# EAGLE board id mini (EAGLE 4.09)
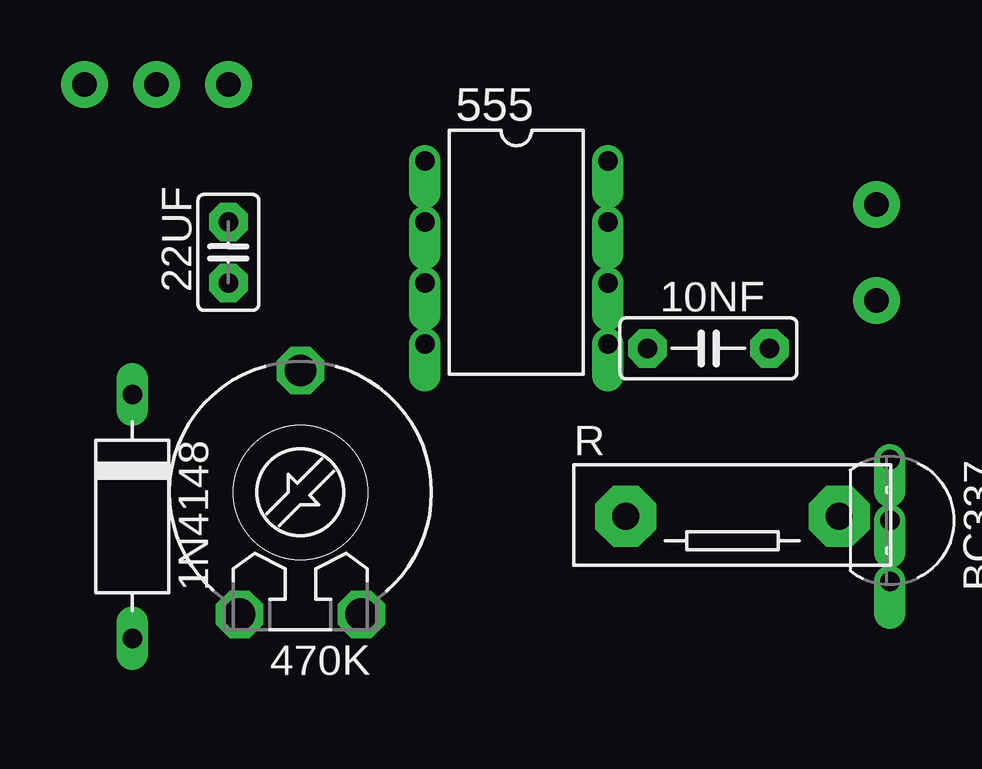
[diagram p0: board, top side]
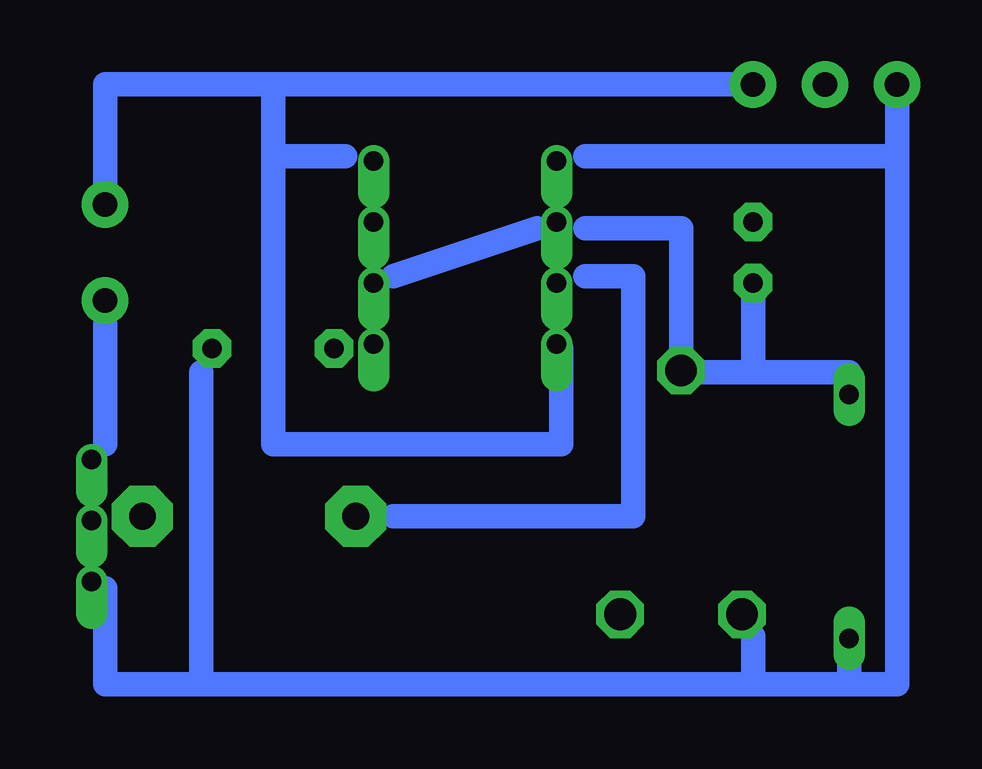
[diagram p1: board, bottom side, seen from below]

No outline drawn. Coordinates in mm, seen from the top.
Copper layers used: Bottom

## Footprints (pad centres in the part's own frame; a part is rotated, then mirrored left to right if it is on the bottom)
D-10 = drill 0.813 long: A 5.08,0; C -5.08,0
C5B2.5 = drill 0.813 pad 1.6 octagon: 1 -2.54,0; 2 2.54,0
C2.5-2 = drill 0.813 pad 1.6 octagon: 1 -1.27,0; 2 1.27,0
LI10 = drill 1.321 octagon: A -2.54,-5.08; E 2.54,-5.08; S 0,5.08
DIL08 = drill 0.813 offset: 1 -3.81,-3.81; 2 -1.27,-3.81; 3 1.27,-3.81; 4 3.81,-3.81; 5 3.81,3.81; 6 1.27,3.81; 7 -1.27,3.81; 8 -3.81,3.81
TO92-CBE = drill 0.813 offset: B 0,0; C 2.54,0; E -2.54,0
MPC70-2 = drill 1.118 pad 2.54 octagon: 1 -4.445,0; 2 4.445,0

## Placement (x,y rotation side)
1N4148  [D-10]  29,15 270 top
10NF  [C5B2.5]  53,22 0 top
22UF  [C2.5-2]  33,26 90 top
470K  [LI10]  36,16 0 top
555  [DIL08]  45,26 270 top
BC337  [TO92-CBE]  60.56,14.83 270 top
R  [MPC70-2]  54,15 0 top

## Library data of the parts
1N4148 = diode
10NF 22UF = capacitor-wima
470K = pot
555 = analog-devices
BC337 = transistor-npn
R = resistor-power

## Tracks (layer width: path | path; a pad name or v marks a point on that pad's centre or on a via)
A  (via drill 1.02 pad 1.93)
  Bottom 1.016: 60,12 60,8 56,8 | 56,8 56,21 | 33,8 56,8 | 33,8 33,10 | 29,8 33,8 | 29,8 29,9 | 27,30 v27,33 | 27,30 40,30 | 27,30 27,8 29,8
S$2
  Bottom 1.016: 42,27 48,25
S$3  (via drill 1.02 pad 1.93)
  Bottom 1.016: 60,23 60,18
  other vias: 60,24
S$4
  Bottom 1.016: 40,25 38,25 38,15 48,15
S$5  (via drill 1.02 pad 1.93)
  Bottom 1.016: v60,28 60,33 53,33 | 53,33 v33,33 | 53,30 53,33 | 53,30 50,30 | 53,30 53,18 41,18 41,22
S$9
  Bottom 1.016: 33,24 33,21 | 40,27 36,27 36,21 33,21 | 33,21 29,21
S$10  (via drill 1.02 pad 1.93)
  other vias: 30,33

## Text on the board
Pads: K1 | _ | 9V | + | K2 | Izzó